# EAGLE board routev3.5_vccgnd (EAGLE 8.6.0)
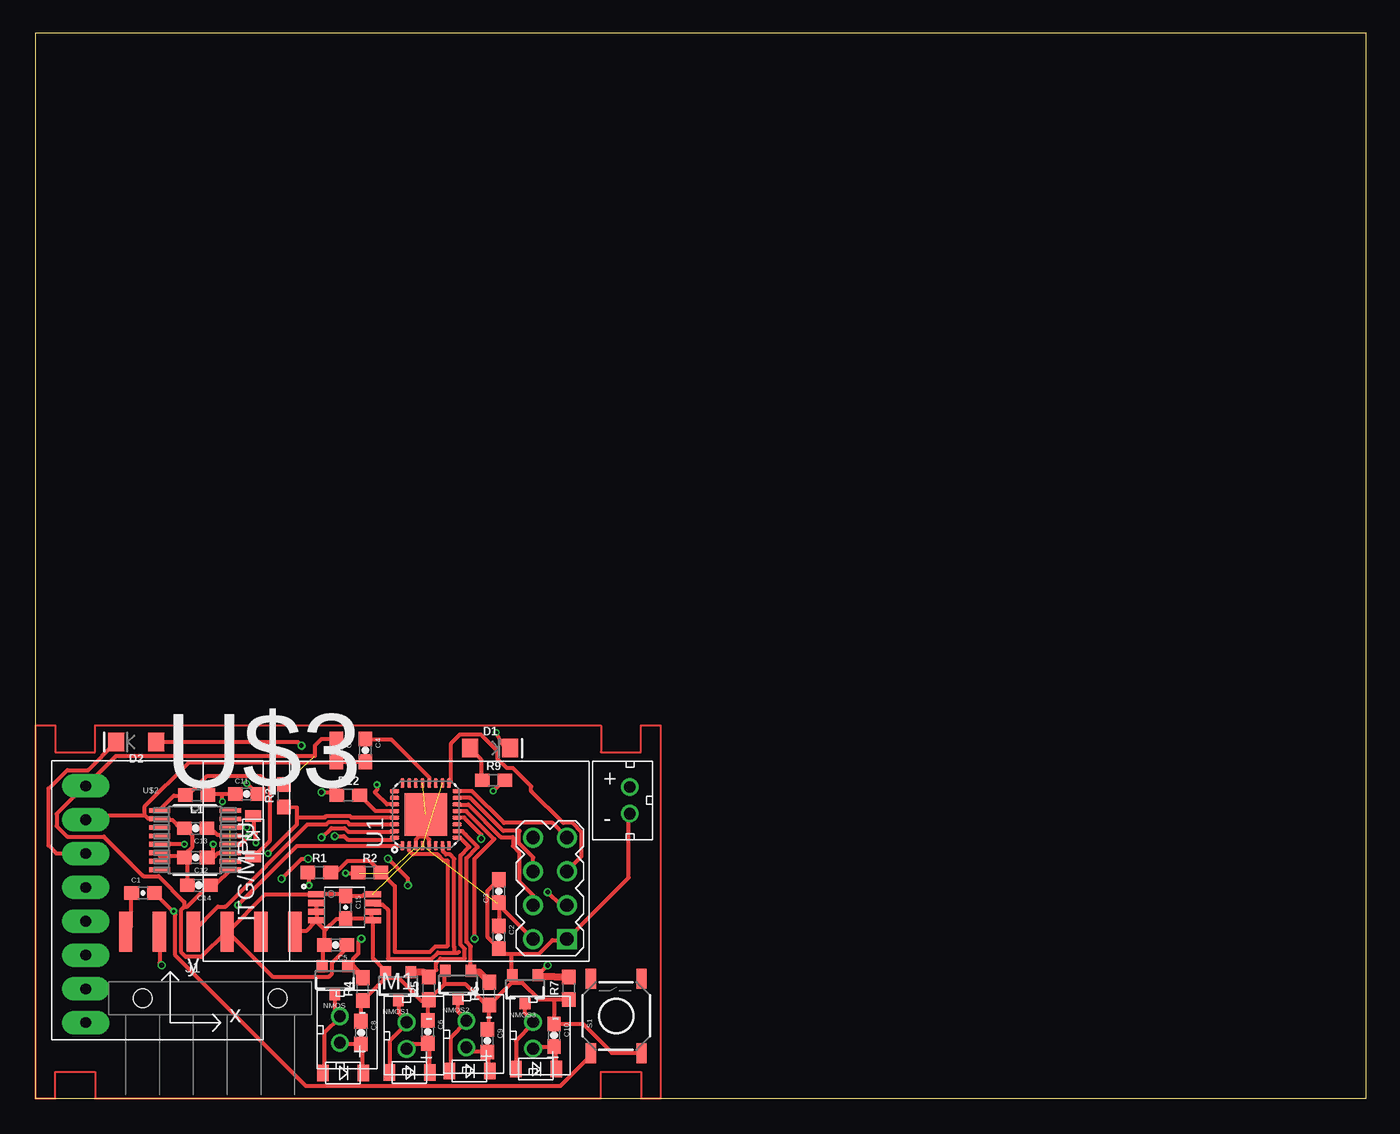
[diagram p0: board, top side]
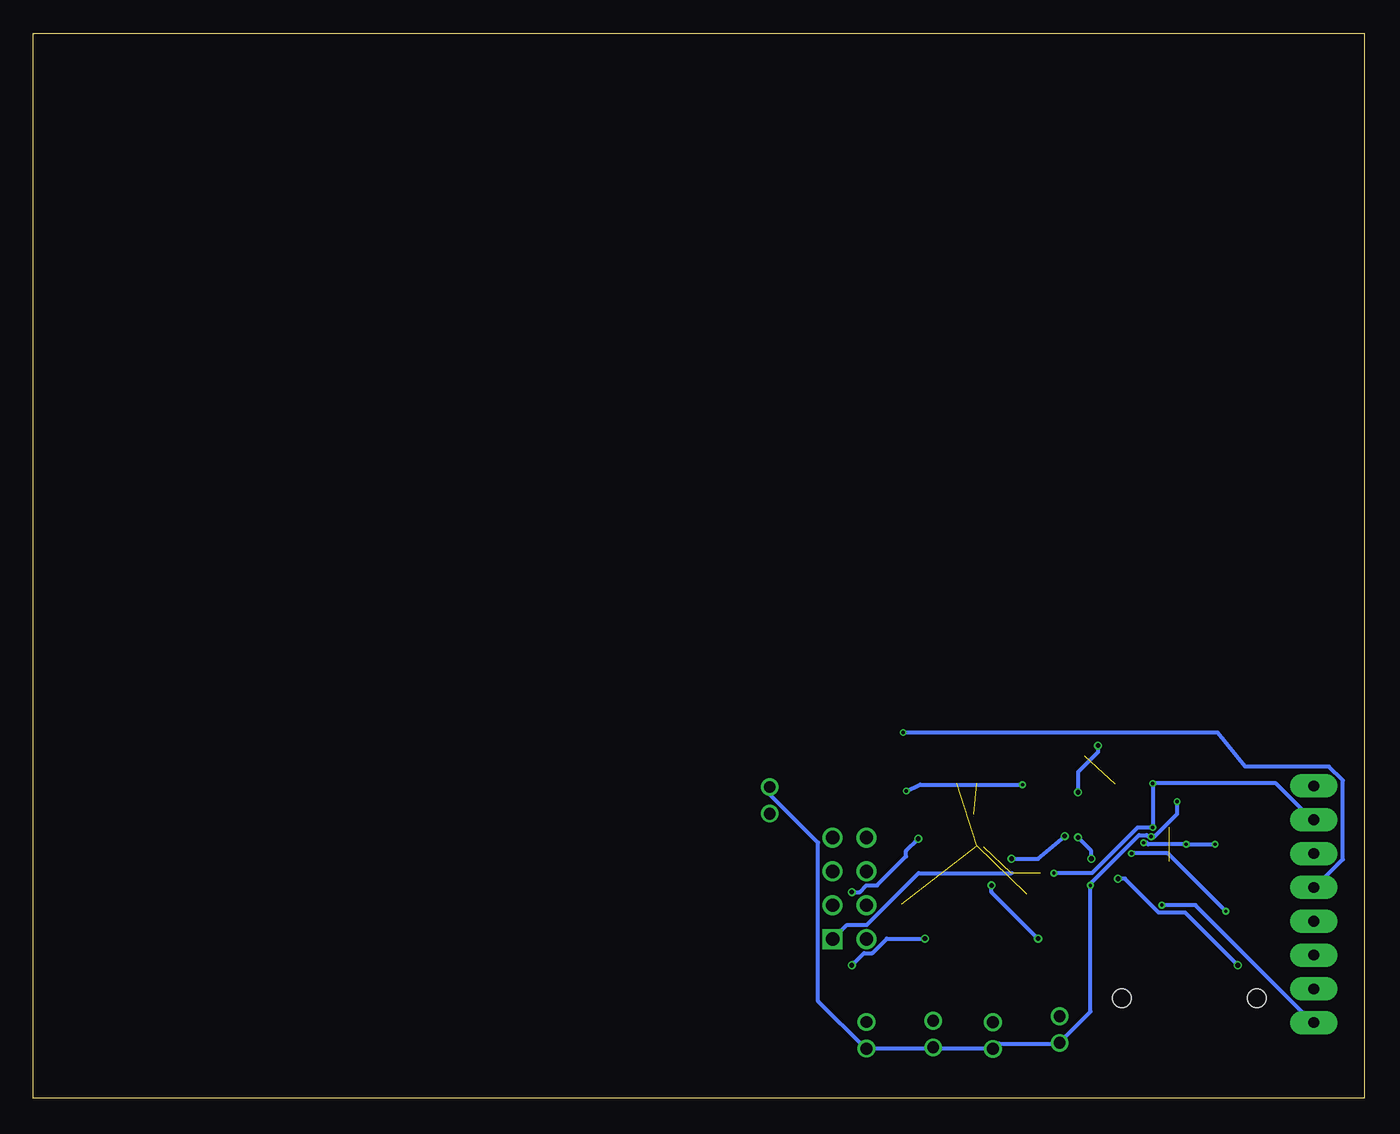
[diagram p1: board, bottom side, seen from below]

Size 100 x 80 mm. Coordinates in mm from the lower left corner, seen from the top.
Outline: 0,0 100,0 100,80 0,80 0,0
Copper layers (1*16): Top 0.035559375mm / dielectric 1.6mm / Bottom 0.035559375mm
Design rules "oshpark-2layer": minimum track width 6mil, minimum drill 10mil, track to track 6mil, track to pad 6mil, pad to pad 6mil, via to via 6mil, smd to smd 6mil, copper to edge 15mil, drill to drill 6mil, minimum pad ring 5mil, minimum via ring 5mil, stop-mask expansion 2.5mil, vias tented up to drill 0mil, thermal gap 10mil
Net classes: 0 default: width 0.305 mm; 1 analog: width 0.508 mm; 2 power: width 0.762 mm

## Footprints (pad centres in the part's own frame; a part is rotated, then mirrored left to right if it is on the bottom)
0603-CAP = smd 1.1 x 1: 1 -0.85,0; 2 0.85,0
LED-1206 = smd 1.2 x 1.4: A -1.5,0; C 1.5,0
MINI2-F3-B = smd 1.22 x 0.85: NEG 0,1.55; POS 0,-1.5
FTDI_DEVICE_RA_SMT = smd 1 x 3: 1 -6.35,5; 2 -3.81,5; 3 -1.27,5; 4 1.27,5; 5 3.81,5; 6 6.35,5 | hole 1.4: -5.08,0; 5.08,0
0603 = smd 1.1 x 1: 1 -0.85,0; 2 0.85,0
WIRELESS-NRF24L01 = drill 1 square: 1 -12.7,6.35 | drill 1: 2 -10.16,6.35; 3 -12.7,3.81; 4 -10.16,3.81; 5 -12.7,1.27; 6 -10.16,1.27; 7 -12.7,-1.27; 8 -10.16,-1.27
JST_CONNECTOR_FEMALE = drill 0.889: + 0,1; - 0,-1
SOT23-3 = smd 0.8 x 0.9: 1 -0.95,-1; 2 0.95,-1; 3 0,1.1
TACTILE-SWITCH-SMD = smd 1.524 x 0.762: 1 -2.794,1.905; 2 2.794,1.905; 3 -2.794,-1.905; 4 2.794,-1.905
MLF32-PAD = smd 0.7 x 0.3: 1 -2.35,1.75; 2 -2.35,1.25; 3 -2.35,0.75; 4 -2.35,0.25; 5 -2.35,-0.25; 6 -2.35,-0.75; 7 -2.35,-1.25; 8 -2.35,-1.75; 17 2.35,-1.75; 18 2.35,-1.25; 19 2.35,-0.75; 20 2.35,-0.25; 21 2.35,0.25; 22 2.35,0.75; 23 2.35,1.25; 24 2.35,1.75 | smd 0.3 x 0.7: 9 -1.75,-2.35; 10 -1.25,-2.35; 11 -0.75,-2.35; 12 -0.25,-2.35; 13 0.25,-2.35; 14 0.75,-2.35; 15 1.25,-2.35; 16 1.75,-2.35; 25 1.75,2.35; 26 1.25,2.35; 27 0.75,2.35; 28 0.25,2.35; 29 -0.25,2.35; 30 -0.75,2.35; 31 -1.25,2.35; 32 -1.75,2.35 | smd 3.2 x 3.2: PAD 0,0
GY-521 = drill 0.8 pad 1.778 long: ADO -8.89,-6.35; GND -8.89,6.35; INT -8.89,-8.89; SCL -8.89,3.81; SDA -8.89,1.27; VCC -8.89,8.89; XCL -8.89,-3.81; XDA -8.89,-1.27
21-0055H_16 = smd 1.6 x 0.356: 1 -2.654,2.223; 2 -2.654,1.587; 3 -2.654,0.953; 4 -2.654,0.318; 5 -2.654,-0.318; 6 -2.654,-0.953; 7 -2.654,-1.587; 8 -2.654,-2.223; 9 2.654,-2.223; 10 2.654,-1.587; 11 2.654,-0.953; 12 2.654,-0.318; 13 2.654,0.318; 14 2.654,0.953; 15 2.654,1.587; 16 2.654,2.223
SOP65P490X110-8N = smd 1.25 x 0.46: 1 -2.11,0.975; 2 -2.11,0.325; 3 -2.11,-0.325; 4 -2.11,-0.975; 5 2.11,-0.975; 6 2.11,-0.325; 7 2.11,0.325; 8 2.11,0.975

## Placement (x,y rotation side)
C1  100nF  [0603-CAP]  8.09,15.42 0 top
C2  10uF  [0603-CAP]  34.83,12.11 270 top
C3  100nF  [0603-CAP]  34.83,15.57 90 top
C4  100nF  [0603-CAP]  24.8,26.14 270 top
C5  100nF  [0603-CAP]  22.57,11.52 180 top
C6  100uF  [0603-CAP]  29.5,4.99 270 top
C7  100nF  [0603-CAP]  22.61,26.14 270 top
C8  100uF  [0603-CAP]  24.47,4.94 270 top
C9  100uF  [0603-CAP]  33.97,4.33 270 top
C10  100uF  [0603-CAP]  38.97,4.74 270 top
C11  100uF  [0603-CAP]  15.87,22.86 0 top
C12  100uF  [0603-CAP]  12.06,18.09 180 top
C13  0.1uF  [0603-CAP]  12.05,20.29 180 top
C14  4.7uF  [0603-CAP]  12.29,16.01 180 top
C15  100nF  [0603-CAP]  23.31,14.35 270 top
D1  Yellow  [LED-1206]  34.18,26.31 0 top
D2  Yellow  [LED-1206]  7.57,26.77 180 top
DIODE  DB2W40300L  [MINI2-F3-B]  23.11,1.9 270 top
DIODE1  DB2W40300L  [MINI2-F3-B]  28.11,1.95 270 top
DIODE2  DB2W40300L  [MINI2-F3-B]  32.61,2.06 270 top
DIODE3  DB2W40300L  [MINI2-F3-B]  37.61,2.2 270 top
DIODE4  DB2W40300L  [MINI2-F3-B]  16.37,19.67 0 top
J1  FTDI_DEVICERA_SMT  [FTDI_DEVICE_RA_SMT]  13.14,7.53 0 top
L1  10uH  [0603]  12.13,22.78 180 top
M1  WIRELESS-NRF24L01  [WIRELESS-NRF24L01]  27.24,18.32 180 top
MOTOR  JST_CONNECTOR_FEMALE  [JST_CONNECTOR_FEMALE]  22.89,5.17 180 top
MOTOR1  JST_CONNECTOR_FEMALE  [JST_CONNECTOR_FEMALE]  27.89,4.72 180 top
MOTOR2  JST_CONNECTOR_FEMALE  [JST_CONNECTOR_FEMALE]  32.39,4.83 180 top
MOTOR3  JST_CONNECTOR_FEMALE  [JST_CONNECTOR_FEMALE]  37.39,4.74 180 top
NMOS  N-CHANNEL-MOSFET-IRLML6244TRPBF  [SOT23-3]  22.5,8.94 180 top
NMOS1  N-CHANNEL-MOSFET-IRLML6244TRPBF  [SOT23-3]  27.27,8.49 180 top
NMOS2  N-CHANNEL-MOSFET-IRLML6244TRPBF  [SOT23-3]  31.77,8.6 180 top
NMOS3  N-CHANNEL-MOSFET-IRLML6244TRPBF  [SOT23-3]  36.8,8.24 180 top
R1  2.2k  [0603]  21.34,16.97 0 top
R2  2.2k  [0603]  25.12,16.97 0 top
R3  10k  [0603]  18.68,22.73 90 top
R4  10k  [0603]  24.61,8.21 90 top
R5  10k  [0603]  29.58,8.26 90 top
R6  10k  [0603]  34.11,7.87 90 top
R7  10k  [0603]  40.08,8.28 90 top
R9  1k  [0603]  34.42,23.89 0 top
R12  1k  [0603]  23.52,22.77 0 top
S1  SWITCH-MOMENTARY-2SMD  [TACTILE-SWITCH-SMD]  43.64,6.19 90 top
U1  3.3V  [MLF32-PAD]  29.34,21.33 90 top
U2  GY-521MPU6050  [GY-521]  12.67,14.58 0 top
U$1  JST_CONNECTOR_FEMALE  [JST_CONNECTOR_FEMALE]  44.67,22.39 0 top
U$2  MAX1672'MAX1672'  [21-0055H_16]  11.99,19.4 0 top
U$3  LTC6930CMS8-8.19LTC6930CMS8-8.19  [SOP65P490X110-8N]  23.23,14.35 0 top

## Library data of the parts
C1 C15 = SparkFun-Capacitors; PROD_ID: CAP-00810
C2-C14 = SparkFun-Passives
D1 D2 = SparkFun-LED; PROD_ID: DIO-09909
DIODE DIODE1-DIODE4 M1 MOTOR MOTOR1-MOTOR3 U2 U$1 = quad
J1 = quad; PROD_ID: CONN-08971
L1 = SparkFun-Coils; PROD_ID: NDUC-07874
NMOS NMOS1-NMOS3 = quad; DATASHEET: http://www.mouser.com/ds/2/196/irlml6244pbf-936666.pdf; MOUSER: 942-IRLML6244TRPBF; URL: http://www.mouser.com/Search/ProductDetail.aspx?R=IRLML6244TRPBFvirtualkey57370000virtualkey942-IRLML6244TRPBF
R1-R7 R9 R12 = SparkFun-Resistors; PROD_ID: RES-08272
S1 = quad; PROD_ID: SWCH-08247
U1 = SparkFun-DigitalIC
U$2 = voltreg
U$3 = LTC6390

## Nets
BATTERY+: C6.2 C8.2 C9.2 C10.2 C11.1 DIODE1.NEG DIODE2.NEG DIODE3.NEG DIODE.NEG L1.1 MOTOR1.+ MOTOR2.+ MOTOR3.+ MOTOR.+ R1.1 U$1.+ U$2.12
FTDI-RX: J1.3 U1.30
FTDI-TX: J1.2 U1.31
GND: C2.2 C3.2 C4.2 C5.2 C6.1 C7.2 C8.1 C9.1 C10.1 C11.2 C12.2 C13.2 C14.2 C15.2 J1.6 M1.1 NMOS1.2 NMOS2.2 NMOS3.2 NMOS.2 R2.1 R4.1 R5.1 R6.1 R7.1 S1.3 U1.3 U1.5 U1.21 U1.PAD U2.GND U$1.- U$2.2 U$2.6 U$2.7 U$2.10 U$2.14 U$3.2 U$3.3 U$3.4 U$3.5 U$3.6
IMU-INT: U1.1 U2.INT
IMU-SCL: D2.C U2.SCL
IMU-SDA: D1.C U2.SDA
MEASURE_PIN: R1.2 R2.2 U1.2
MOTOR1 [analog]: NMOS.1 R4.2 U1.32
MOTOR2 [analog]: NMOS1.1 R5.2 U1.9
MOTOR3 [analog]: NMOS2.1 R6.2 U1.10
MOTOR4 [analog]: NMOS3.1 R7.2 U1.13
N$1: DIODE4.POS L1.2 U$2.1
N$2: C4.1 U1.20
N$3: R9.2 U1.27
N$4: DIODE1.POS MOTOR1.- NMOS1.3
N$5: DIODE2.POS MOTOR2.- NMOS2.3
N$6: DIODE.POS MOTOR.- NMOS.3
N$7: DIODE3.POS MOTOR3.- NMOS3.3
N$8: D1.A R9.1
N$9: D2.A R12.1
N$10: R12.2 U1.28
N$13: C1.1 J1.1
OSC1: U1.7 U$3.7
RESET: C1.2 R3.1 S1.1 U1.29
RF-CE: M1.3 U1.12
RF-CSN: M1.4 U1.14
RF-MISO: M1.7 U1.16
RF-MOSI: M1.6 U1.15
RF-SCK: M1.5 U1.17
VCC: C2.1 C3.1 C5.1 C7.1 C14.1 C15.1 J1.4 M1.2 R3.2 U1.4 U1.18 U2.VCC U$2.9 U$3.1 U$3.8
VR-PS: C12.1 DIODE4.NEG U$2.5 U$2.11
VR-REF: C13.1 U$2.13

## Tracks (layer width: path | path; a pad name or v marks a point on that pad's centre or on a via)
BATTERY+  (via drill 0.25)
  Top 0.305: C11.1 14.06,22.86 | 14.06,22.86 13.03,22.86 L1.1 | MOTOR.+ 22.97,4.12 24.46,4.12 C8.2 24.57,4 24.57,1.94 DIODE.NEG | v20.57,16 20.57,16.92 R1.1 | v16,19.66 15.43,19.09 14.74,19.09 U$2.12 | v14.06,22.29 14.06,22.86 | MOTOR1.+ 28,3.77 28.35,4.12 29.49,4.12 C6.2 29.6,4.12 29.6,2.06 DIODE1.NEG | DIODE2.NEG 34.06,2.17 34.06,3.43 C9.2 33.83,3.54 32.69,3.54 32.46,3.77 MOTOR2.+ | MOTOR3.+ 37.49,3.77 37.6,3.89 38.86,3.89 C10.2 39.09,3.89 39.09,2.29 DIODE3.NEG
  Bottom 0.305: v14.06,22.29 14.06,21.37 15.77,19.66 v16,19.66 16.23,19.66 16.34,19.77 16.92,19.77 20.57,16.12 v20.57,16 20.57,6.51 22.86,4.23 MOTOR.+ 22.97,4.12 27.43,4.12 27.77,3.77 MOTOR1.+ 28,3.77 32.35,3.77 MOTOR2.+ 32.46,3.77 37.26,3.77 MOTOR3.+ 37.49,3.77 41.03,7.32 41.03,19.2 44.58,22.75 44.58,23.32 U$1.+
FTDI-RX
  Top 0.305: 26.98,20.57 U1.30 23.61,20.58 23.43,20.76 22.06,20.76 21.87,20.57 20.46,20.57 14.29,14.4 13.72,14.4 11.89,12.57 J1.3
FTDI-TX  (via drill 0.35)
  Top 0.305: J1.2 9.34,10.16 v9.5,10 | v18.5,16.5 20,18 v20.5,18 | 26.87,20.12 26.97,20.08 U1.31 26.95,20.04 23.51,20.04 23.24,20.31 22.25,20.31 21.54,19.6 v21.5,19.6
  Bottom 0.305: v9.5,10 13.46,13.96 15.43,13.96 17.98,16.5 v18.5,16.5 | v20.5,18 20.5,18.6 v21.5,19.6
GND  (via drill 0.25)  (4 unrouted)
  Top 0.305: 9.37,18.17 9.37,18.4 U$2.6 | 9.37,18.17 9.37,17.83 U$2.7 | C14.2 11.43,16.12 11.43,17.95 11.32,18.06 C12.2 | 9.37,18.17 11.09,18.17 C12.2 | C4.2 24.69,25.26 22.63,25.26 C7.2 22.52,25.26 11.54,25.26 8.23,21.95 8.23,21.26 | 8.23,21.26 8.46,21.03 9.26,21.03 U$2.2 9.37,20.92 10.29,20.92 10.86,20.34 11.09,20.34 C13.2 11.32,20.23 11.77,19.77 11.77,18.86 11.32,18.4 11.32,18.17 C12.2 | 29.38,19.66 28.8,19.66 28.57,19.43 28.57,19.09 U1.3 28.57,18.86 | 29.38,19.66 29.6,19.43 29.6,19.09 U1.5 | 24.35,16.92 R2.1 24.23,16.92 v23.32,16.92 | 29.38,19.66 29.38,21.26 U1.PAD | v15.89,23.66 16.69,22.86 C11.2 | v15.89,20.34 14.74,20.34 U$2.14 | 8.23,21.26 4.12,21.26 3.89,21.03 U2.GND | U$1.- 44.58,21.37 44.58,16.57 40.01,12 M1.1 39.89,11.89 38.86,11.89 37.83,10.86 35.78,10.86 | U$3.5 25.26,13.49 23.32,13.49 C15.2 23.2,13.49 22.63,13.49 21.83,12.69 21.72,12.69 | U$3.6 25.26,13.95 25.26,13.6 U$3.5 | NMOS.2 21.6,9.94 21.6,11.32 21.72,11.43 C5.2 21.72,11.66 21.72,12.69 | U$3.4 21.14,13.49 21.14,13.95 U$3.3 21.14,14.17 21.14,14.63 U$3.2 | 21.72,12.69 21.14,13.26 U$3.4 | J1.6 19.55,12.57 20.34,12.57 21.03,13.26 U$3.4 | S1.3 45.49,3.43 43.32,3.43 41.15,5.6 39.09,5.6 C10.1 38.98,7.43 R7.1 38.86,7.43 37.83,7.43 36.58,8.69 35.78,8.69 | 26.29,9.03 26.29,9.49 NMOS1.2 26.29,9.6 25.38,10.52 25.38,13.26 U$3.5 | 26.29,9.03 24.69,7.43 R4.1 24.46,7.32 24.46,5.83 C8.1 | 30.75,8.57 30.75,9.49 NMOS2.2 | 30.75,8.57 29.6,7.43 R5.1 | C6.1 29.49,5.94 29.49,7.32 R5.1 | 35.78,8.69 35.78,9.14 NMOS3.2 35.78,9.37 35.78,10.86 | 35.78,8.69 34.18,7.09 R6.1 | C9.1 34.06,5.26 34.06,6.97 R6.1 | C3.2 34.75,16.34 33.95,15.54 33.95,12.14 C2.2 35.23,10.86 35.78,10.86
  Top 0.305: 30.75,8.57 32.35,8.57 33.95,6.97 R6.1 | 26.29,9.03 27.32,9.03 29.03,7.32 29.38,7.32 R5.1
  Bottom 0.305: U2.GND 3.89,20.92 6.63,23.66 v15.89,23.66 v15.89,20.34 17.03,20.34 20.46,16.92 v23.32,16.92 | 26.5,16.92 33.49,16.92 37.38,13.03 38.86,13.03 39.89,12 M1.1
IMU-INT  (via drill 0.25)
  Top 0.305: v15.2,14.52 19.66,18.97 27.55,18.97 U1.1
  Bottom 0.305: v15.2,14.52 12.69,14.52 3.89,5.71 U2.INT
IMU-SCL
  Top 0.305: U2.SCL 1.61,18.39 1,19 1,23.26 2.4,24.66 3.97,24.66 D2.C
IMU-SDA  (via drill 0.25)
  Top 0.305: v34.63,27.48 35.2,26.4 35.66,26.4 D1.C
  Bottom 0.305: v34.63,27.48 11,27.48 8.94,24.92 2.65,24.92 1.63,23.89 1.6,23.89 1.6,17.95 3.77,15.77 U2.SDA
MEASURE_PIN
  Top 0.305: R1.2 22.29,17.03 22.63,17.03 23.43,17.83 25.15,17.83 25.95,17.03 R2.2 27,15.95 27,11 29.65,11 30.06,11.41 30.91,11.41 31,11.5 31,17.83 30.96,17.87 30.67,17.87 30.21,18.32 28.36,18.32 28.09,18.59 U1.2
MOTOR1  (via drill 0.35)
  Top 0.305: v24.5,12 24.27,11.78 24.27,10.89 23.89,10.51 23.89,9.83 | v28,16 28,16.5 v26.5,18 | 26.91,19.5 U1.32 26.84,19.43 23.47,19.43 23.2,19.7 v22.5,19.7
  Top 0.508: NMOS.1 23.55,9.83 23.89,9.83 24.57,9.14 R4.2
  Bottom 0.305: v24.5,12 28,15.5 v28,16 | v26.5,18 24.5,18 v22.5,19.7
MOTOR2
  Top 0.305: R5.2 30.11,9.64 30.11,10.18 30.44,10.5 32.26,10.5 32.26,11.23 31.94,11.56 31.94,18.23 32.6,18.89 31.91,19.58 U1.9
  Top 0.508: NMOS1.1 28.23,9.49 29.15,9.49 29.49,9.14 R5.2
MOTOR3
  Top 0.305: NMOS2.1 32.72,11.42 32.39,11.75 32.39,18.04 33.25,18.89 32.34,19.8 32.34,19.81 32.08,20.08 U1.10
  Top 0.508: NMOS2.1 32.8,9.49 33.38,9.49 34.06,8.8 R6.2
MOTOR4  (via drill 0.35)
  Top 0.305: NMOS3.1 v38.5,9.99 v38.5,10 | v33,12 33,18 34.48,19.48 32.38,21.57 31.83,21.57 31.82,21.58 U1.13
  Top 0.508: NMOS3.1 37.83,9.14 38.98,9.14 R7.2
  Bottom 0.305: v38.5,10 37.59,10.91 36.96,10.91 35.88,12 v33,12
N$1
  Top 0.305: U$2.1 9.37,21.72 10.4,22.75 11.2,22.75 L1.2 11.43,22.75 12.92,24.23 16.92,24.23 17.6,23.55 17.6,19.32 16.46,18.17 DIODE4.POS
N$2
  Top 0.305: U1.20 29.6,23.77 29.6,24.12 26.75,26.98 24.8,26.98 C4.1
N$3  (via drill 0.25)
  Top 0.305: v34.4,23.09 35.2,23.89 R9.2 | 25.77,23.56 v25.68,23.56 25.68,23.18 25.5,23 26.42,22.08 U1.27 26.95,22.12
  Bottom 0.305: v25.68,23.56 33.38,23.56 v34.4,23.09
N$4
  Top 0.305: NMOS1.3 27.32,7.32 27.32,6.4 27.89,5.83 MOTOR1.- 27.89,5.6 26.63,4.34 26.63,2.06 DIODE1.POS
N$5
  Top 0.305: NMOS2.3 31.77,7.43 31.77,6.51 32.35,5.94 MOTOR2.- 32.35,5.71 31.2,4.57 31.2,2.17 DIODE2.POS
N$6
  Top 0.305: NMOS.3 22.52,7.77 22.52,6.51 22.86,6.17 MOTOR.- 22.86,6.06 21.72,4.92 21.72,1.94 DIODE.POS
N$7
  Top 0.305: NMOS3.3 36.8,7.09 36.8,6.4 37.38,5.83 MOTOR3.- 37.38,5.6 36.12,4.34 36.12,2.29 DIODE3.POS
N$8
  Top 0.305: R9.1 33.49,24 33.49,25.49 32.69,26.29 D1.A
N$9  (via drill 0.35)
  Top 0.305: D2.A 19.73,26.77 v20,26.5 | v21.5,23 22.44,23 R12.1
  Bottom 0.305: v20,26.5 20,26 21.5,24.5 v21.5,23
N$10
  Top 0.305: U1.28 25.56,21.58 R12.2
N$11
  Top 0.152: 0,0 1.5,0 1.5,2 4.5,2 4.5,0 42.5,0 42.5,2 45.5,2 45.5,0 47,0 47,28 45.5,28 45.5,26 42.5,26 42.5,28 4.5,28 4.5,26 1.5,26 1.5,28 0,28 0,0
N$13
  Top 0.305: C1.1 7.2,15.32 7.2,12.92 6.86,12.57 J1.1
OSC1
  Top 0.305: U1.7 30.63,18.97 30.63,18.55 30.86,18.32 31.15,18.32 31.48,18 31.48,11.37 31.5,11.35 31.5,10.96 | 25.38,14.74 U$3.7 25.45,14.56 26.09,14.56 26.5,14.15 26.5,10.5 29.79,10.5 30.25,10.96 31.5,10.96 | 31.5,10.96 31.76,10.96 31.81,11
RESET  (via drill 0.25)
  Top 0.305: 10.34,14 10.52,13.83 10.52,10.74 20.34,0.91 39.43,0.91 41.83,3.31 S1.1 | 10.34,14 9.03,15.32 C1.2 | 19.66,21.1 19.66,20.57 v17.49,18.4 | 19.66,21.1 19.66,21.83 R3.1 | v10.4,14.06 10.34,14 | 19.66,21.1 21.75,21.1 21.87,21.22 23.62,21.22 23.74,21.1 26.97,21.1 U1.29
  Bottom 0.305: v17.49,18.4 14.74,18.4 v10.4,14.06
RF-CE  (via drill 0.35)
  Top 0.305: M1.3 39.49,14.51 v38.5,15.5 | v33.5,19.5 33.5,19.81 32.23,21.08 U1.12
  Bottom 0.305: v38.5,15.5 37.9,15.5 37.41,15.99 36.59,15.99 34.42,18.17 34.42,18.58 v33.5,19.5
RF-CSN
  Top 0.305: U1.14 31.77,22.06 32.54,22.06 34.97,19.63 35.89,19.63 35.89,18.96 36.34,18.51 36.34,16.3 37.4,15.24 M1.4 37.38,14.52
RF-MISO
  Top 0.305: U1.16 31.77,23.09 32.8,23.09 35.2,20.69 38.86,20.69 39.89,19.66 M1.7
RF-MOSI
  Top 0.305: M1.6 37.4,18.1 36.34,19.15 36.34,20.03 36.41,20.09 35.16,20.09 32.67,22.58 U1.15
RF-SCK
  Top 0.305: U1.17 31.2,23.77 31.2,26.63 31.89,27.32 33.49,27.32 34.75,26.06 34.75,25.49 35.43,24.8 35.89,24.8 37.26,23.43 37.26,23.09 39.66,20.69 40.35,20.69 41.03,20 41.03,18.17 40.01,17.14 M1.5
VCC  (4 unrouted)
  Top 0.305: U$3.8 25.26,15.32 24.69,15.32 24.57,15.2 C15.1 23.2,15.32 21.14,15.32 U$3.1 21.03,15.32 17.26,15.32 14.52,12.57 J1.4 | U$2.9 14.63,17.14 13.6,16.12 13.14,16.12 C14.1 13.03,16 11.43,14.4 11.2,14.4 | C5.1 23.32,11.43 23.32,11.2 22.29,10.17 22.29,9.37 22.06,9.14 17.83,9.14 14.52,12.46 J1.4 | 11.2,14.4 10.97,14.17 10.97,10.97 11.32,10.63 12.46,10.63 14.29,12.46 J1.4 | M1.2 37.38,12 34.75,14.63 C3.1 C2.1 | 22.52,26.98 C7.1 21.49,26.99 21,26.5 21,25.72 6.06,25.72 3.89,23.55 U2.VCC 3.66,23.43 1.6,21.37 1.6,20.46 2.4,19.66 5.14,19.66 8.12,16.69 9.26,16.69 11.2,14.74 11.2,14.4
VR-PS  (via drill 0.25)
  Top 0.305: U$2.11 14.63,18.4 13.72,18.4 13.49,18.17 12.92,18.17 C12.1 13.37,18.29 v13.37,19.09 | v16.57,19.2 16.57,19.89 16.46,20 16.46,21.14 DIODE4.NEG | v11.2,19.09 9.37,19.09 U$2.5
  Bottom 0.305: v16.57,19.2 16.34,19.2 16.23,19.09 v13.37,19.09 v11.2,19.09
VR-REF
  Top 0.305: C13.1 12.92,20.23 13.26,20.23 13.72,19.77 14.63,19.77 U$2.13